# Altium PCB PCB2maks.pcbdoc (part 1 of 2)
Units mm, origin at the board's own origin, x right, y up, seen from the top; angles counter-clockwise.
Board outline 120 x 90 mm, 2 copper layers (Top Layer, Bottom Layer); 58 components, 77 nets, 319 pads, 159 vias.
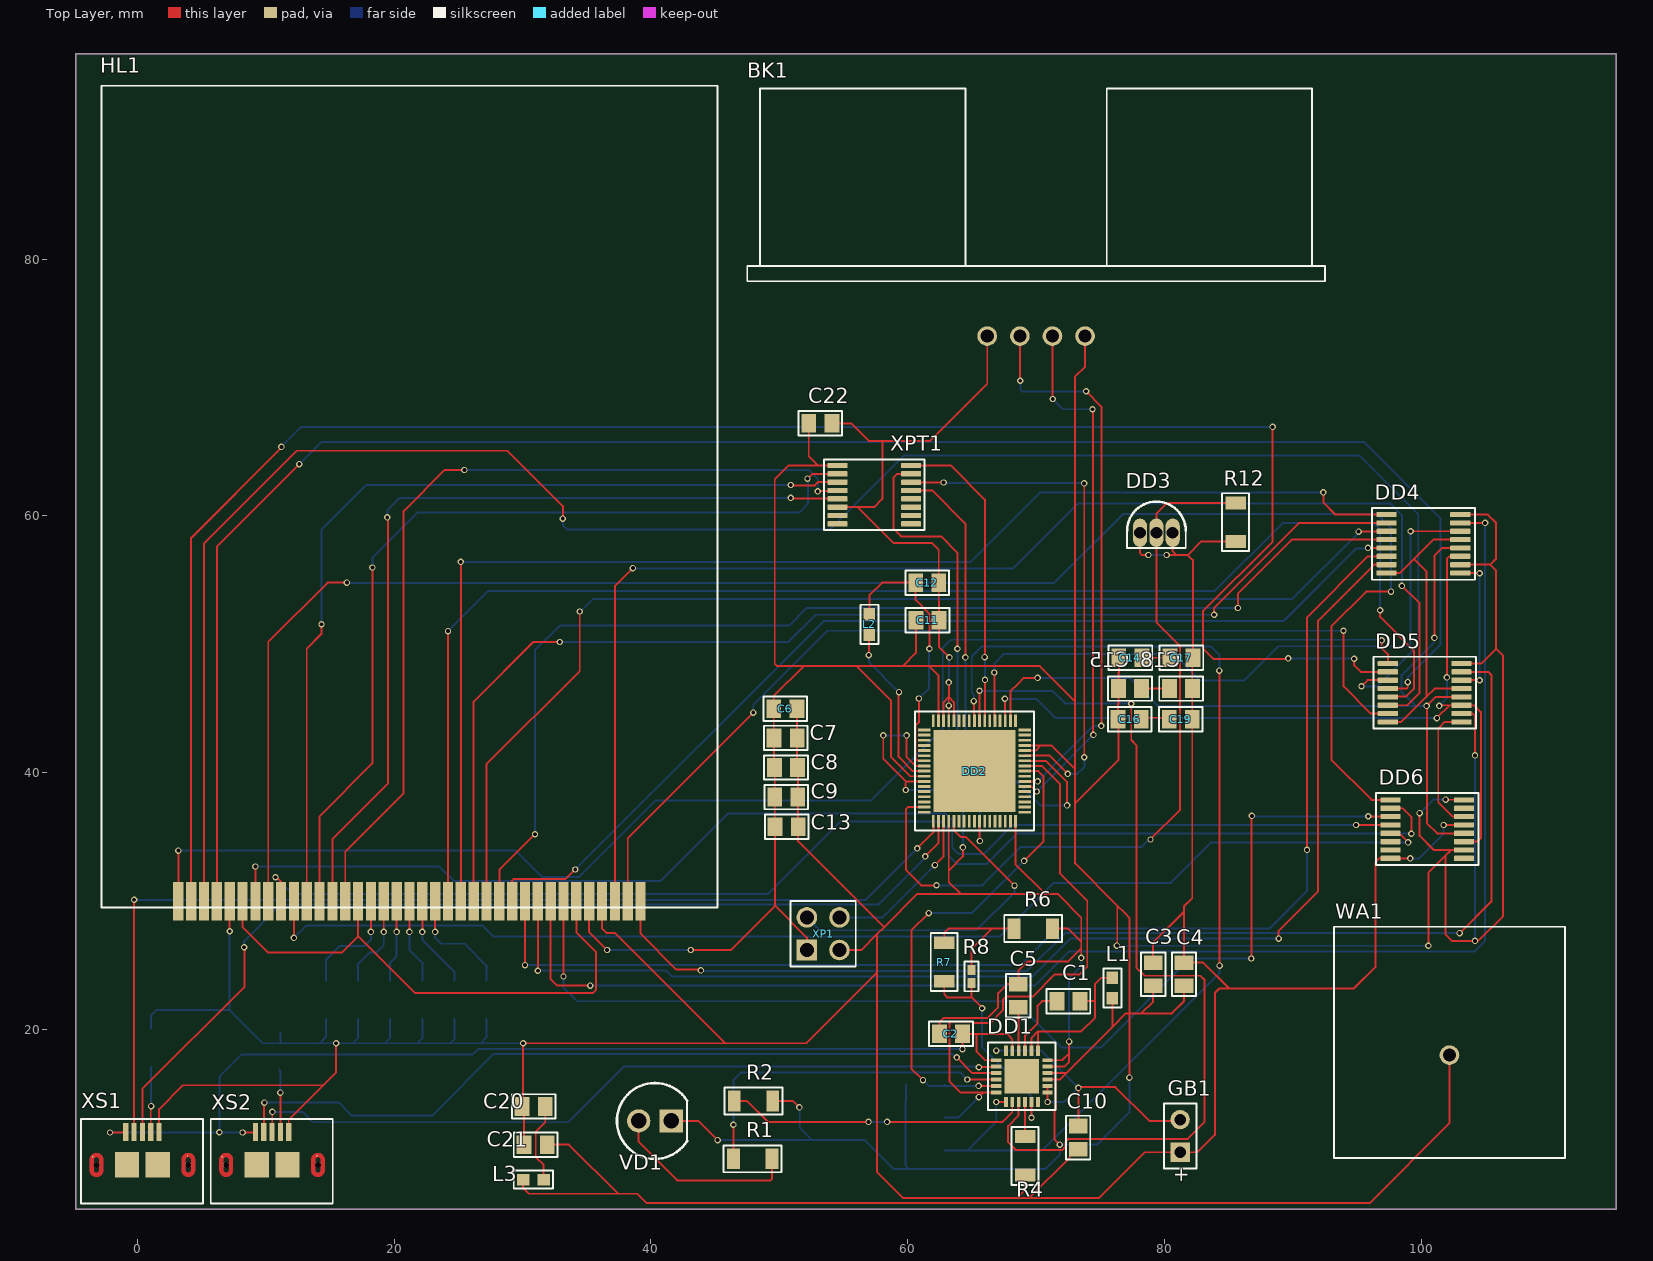
[diagram p0: Top Layer view]
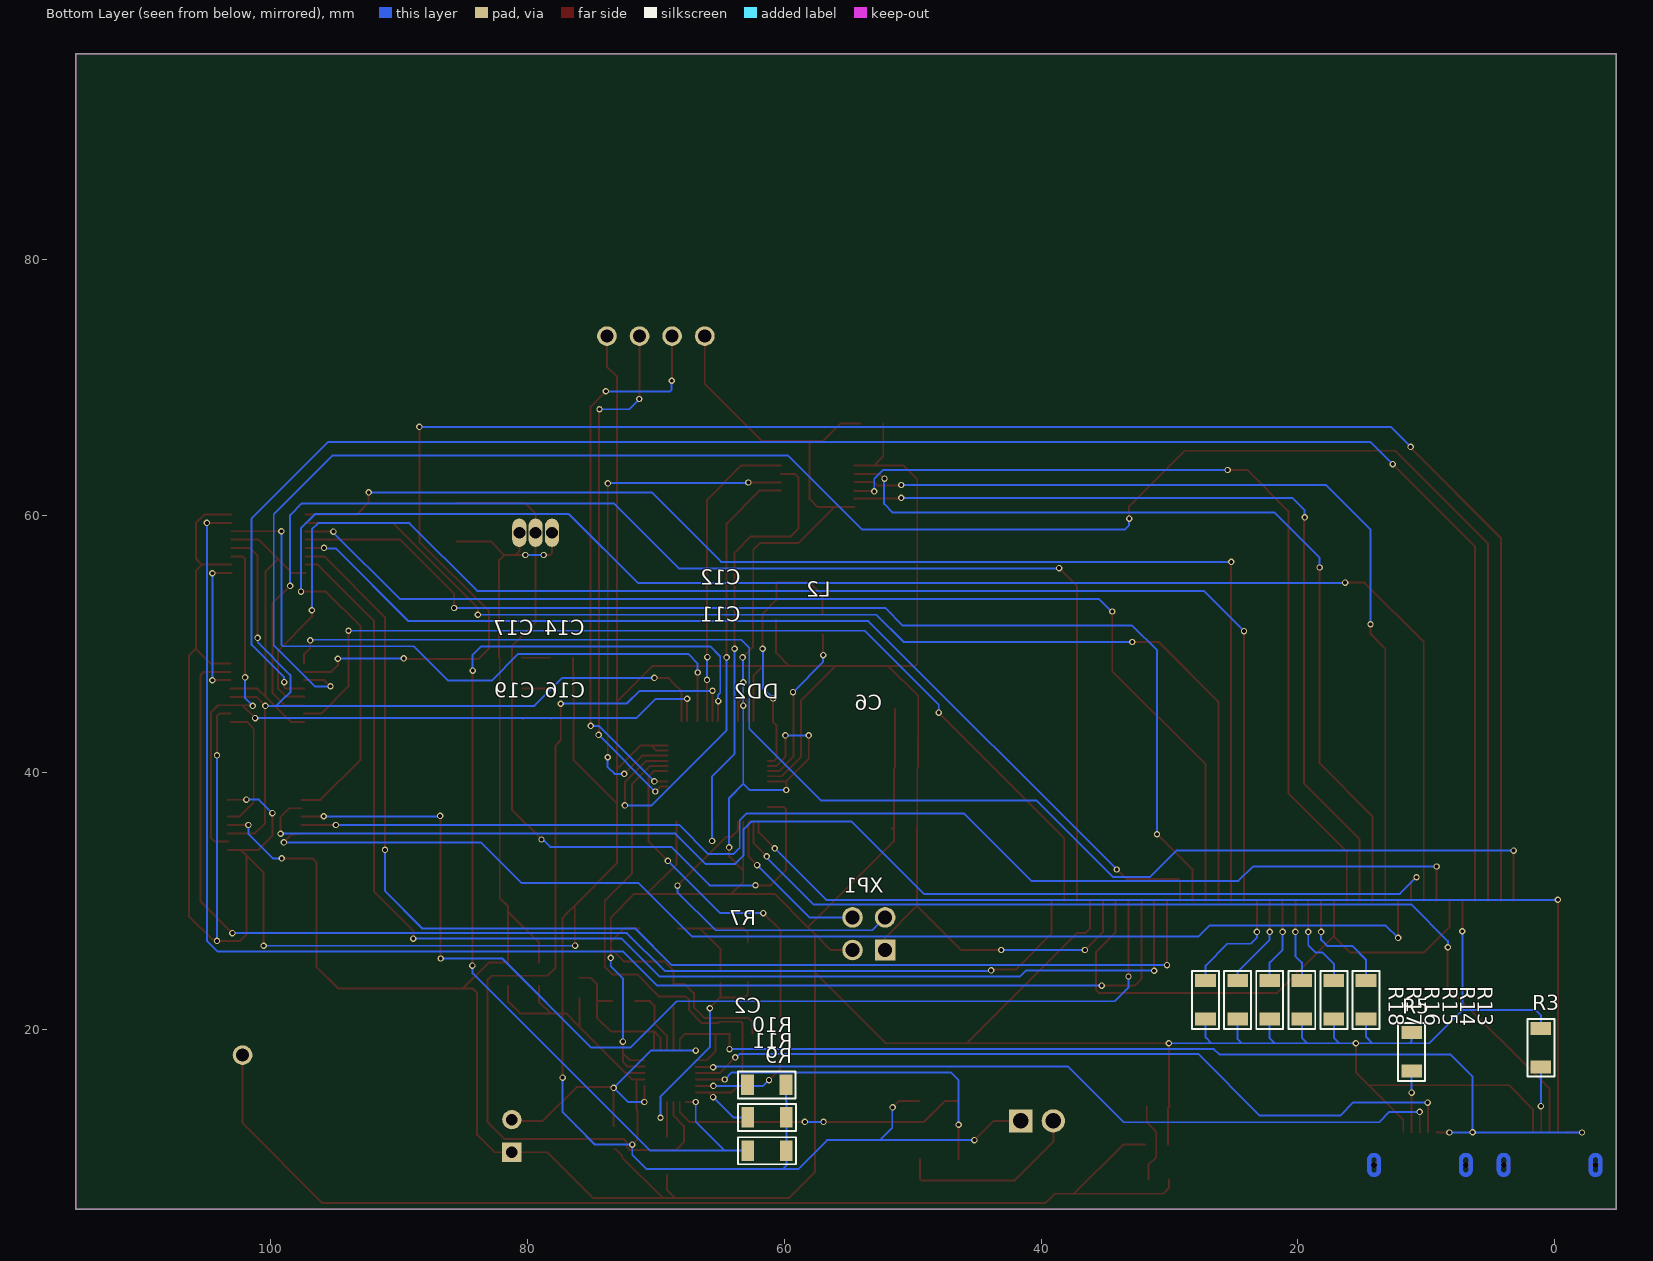
[diagram p1: Bottom Layer view, seen from below]
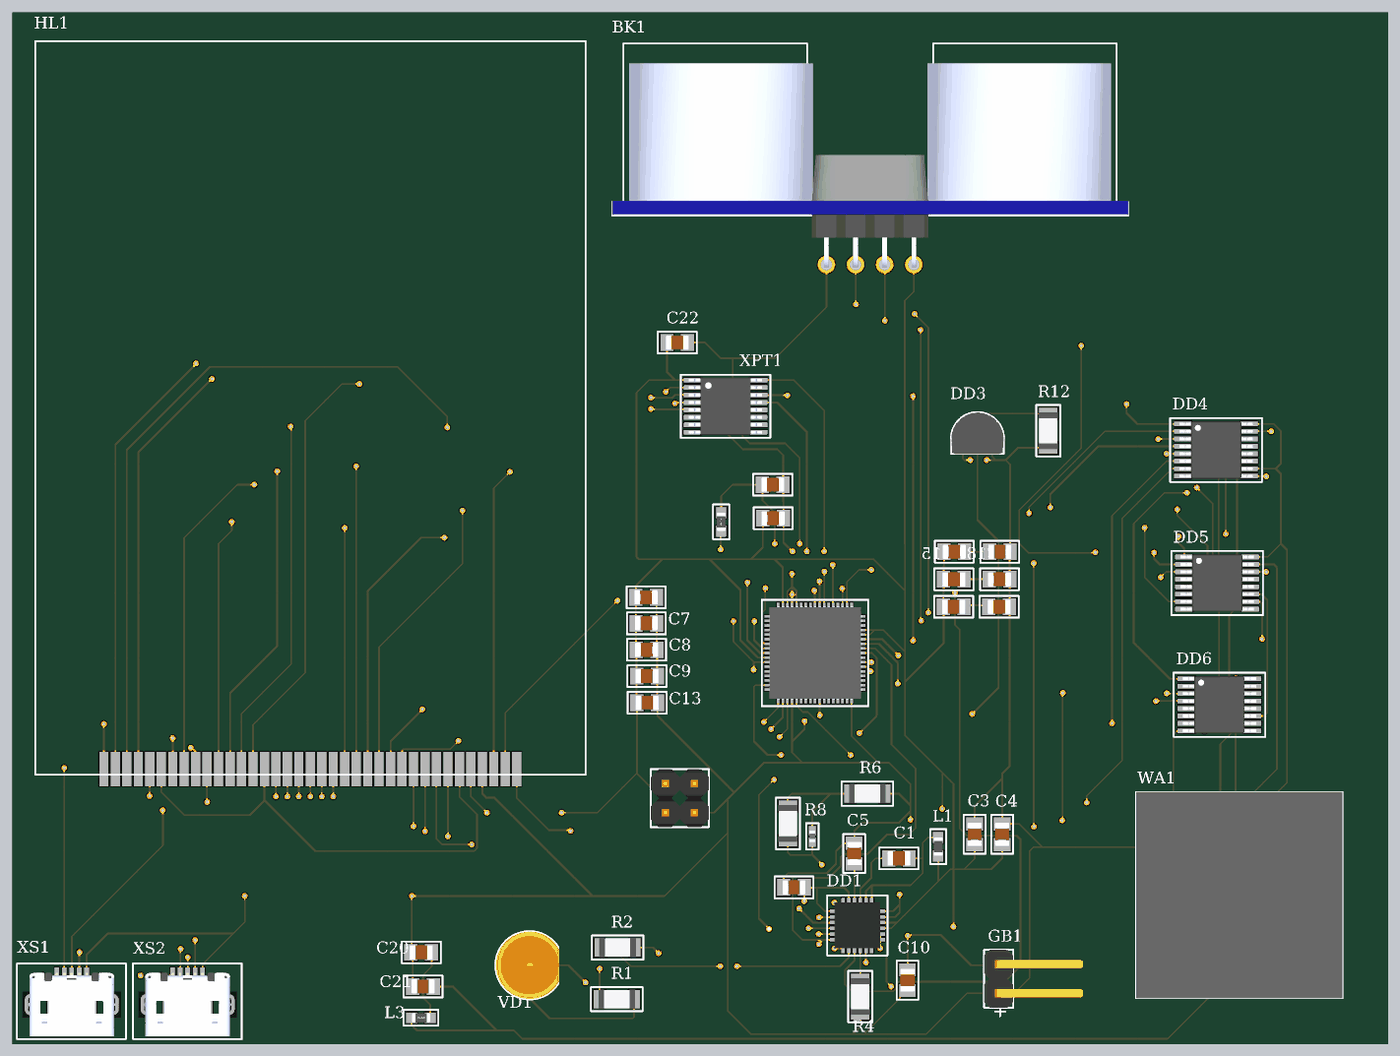
[diagram p3: 3D render of the assembled board from above, using the file's embedded part models]
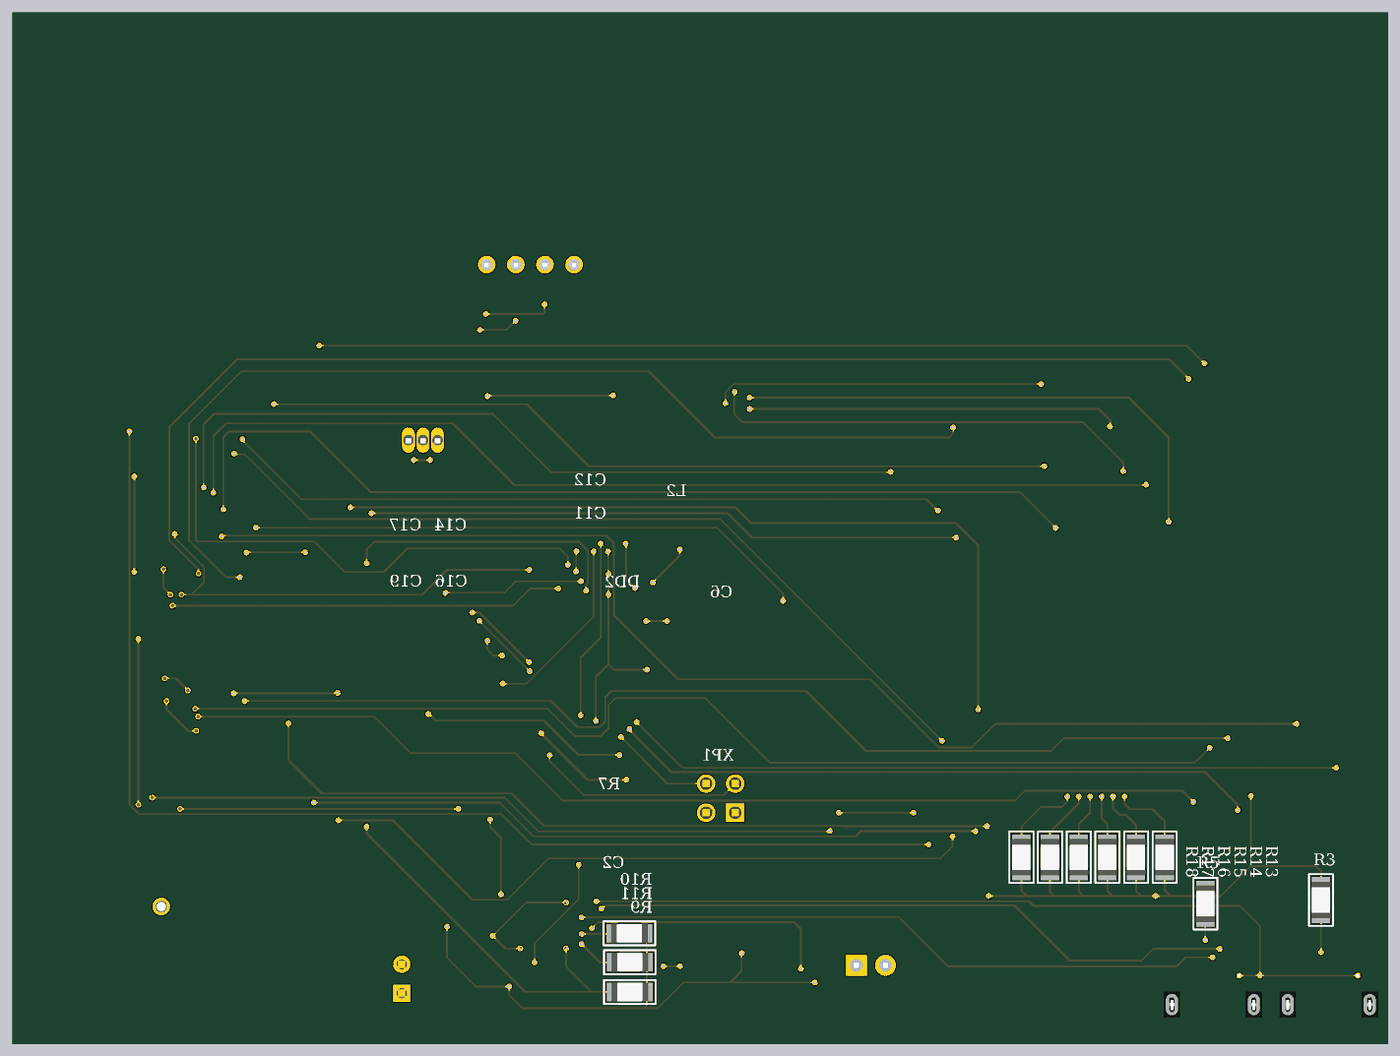
[diagram p4: 3D render of the assembled board from below, using the file's embedded part models]

## Layer stack, top to bottom
Top Solder: solder mask 0.0102, Solder Resist, Dk 3.5
Top Layer: signal copper 0.0356
Dielectric 1: dielectric 0.32, FR-4, Dk 4.8
Bottom Layer: signal copper 0.0356
Bottom Solder: solder mask 0.0102, Solder Resist, Dk 3.5

## Board outline
-4.8,6 115.2,6 115.2,96 -4.8,96

## Design rules (kind name [scope] priority, off if disabled: settings)
Clearance [All] p1: gap=0.1 ignorepadtopadclearanceinfootprint=TRUE
PolygonConnect [All] p1: connectstyle=Relief reliefconductorwidth=0.254 reliefentries=4 polygonreliefangle="90 Angle" airgapwidth=0.254
RoutingVias [All] p1: holewidth=0.3 width=0.5 viastyle="Through Hole" minholewidth=0.3 minwidth=0.5 maxholewidth=0.3 maxwidth=0.5
SolderMaskExpansion [All] p1: expansion=0.102 istentingtop=FALSE
Width [All] p1: maxlimit=10 minlimit=0.15 preferedwidth=0.2
30 further rules are at their usual default settings.

## Components (designator, comment, footprint, x,y, rotation, side; value= is the part's Value field where it differs from the comment)
BK1 "HC-SR04" HC-SR04 70.01,74 r180 top
C1 "Capacitor C0402C100C5GAC" Capasitor 72.525,22.2 r180 top
C2 "Capacitor C0402C100C5GAC" Capasitor 63.375,19.675 r0 top
C3 "Capacitor C0402C100C5GAC" Capasitor 79.125,24.3 r270 top
C4 "Capacitor C0402C100C5GAC" Capasitor 81.525,24.3 r270 top
C5 "Capacitor C0402C100C5GAC" Capasitor 68.625,22.625 r90 top
C6 "Capacitor C0402C100C5GAC" Capasitor 50.475,44.975 r0 top
C7 "Capacitor C0402C100C5GAC" Capasitor 50.5,42.7 r0 top
C8 "Capacitor C0402C100C5GAC" Capasitor 50.525,40.4 r0 top
C9 "Capacitor C0402C100C5GAC" Capasitor 50.55,38.1 r0 top
C10 "Capacitor C0402C100C5GAC" Capasitor 73.275,11.575 r270 top
C11 "Capacitor C0402C100C5GAC" Capasitor 61.55,51.875 r0 top
C12 "Capacitor C0402C100C5GAC" Capasitor 61.525,54.8 r180 top
C13 "Capacitor C0402C100C5GAC" Capasitor 50.575,35.775 r180 top
C14 "Capacitor C0402C100C5GAC" Capasitor 77.35,48.95 r0 top
C15 "Capacitor C0402C100C5GAC" Capasitor 77.32,46.55 r0 top
C16 "Capacitor C0402C100C5GAC" Capasitor 77.295,44.15 r0 top
C17 "Capacitor C0402C100C5GAC" Capasitor 81.325,48.95 r0 top
C18 "Capacitor C0402C100C5GAC" Capasitor 81.295,46.55 r0 top
C19 "Capacitor C0402C100C5GAC" Capasitor 81.27,44.15 r0 top
C20 "Capacitor C0402C100C5GAC" Capasitor 30.875,14 r0 top
C21 "Capacitor C0402C100C5GAC" Capasitor 31.025,11.025 r0 top
C22 "Capacitor C0402C100C5GAC" Capasitor 53.2,67.2 r180 top
DD1 "BQ24295RGER" bq24295 68.9,16.35 r0 top
DD2 "STM32WB55 VFQFPN68" STM32WB55VFQFPN68 65.2,40.12 r180 top
DD3 "DS18B20_1" ds18b20 79.375,59.525 r0 top
DD4 "HC595" 54HC595 100.175,57.825 r0 top
DD5 "HC595" 54HC595 100.27,46.225 r0 top
DD6 "HC595" 54HC595 100.47,35.6 r0 top
GB1 "Battery_1" Battery 81.407,11.665 r90 top
HL1 "ILI9341" ILI9325 21.2,61.5 r90 top
L1 "INDUCTION" "10uH Inductor" 75.95,23.24 r90 top
L2 "INDUCTION" "10uH Inductor" 57.025,51.565 r90 top
L3 "INDUCTION" "10uH Inductor" 30.865,8.3 r0 top
R1 "Resistor CRT0805-BY-1503EAS" Resistor 47.925,9.925 r180 top
R2 "Resistor CRT0805-BY-1503EAS" Resistor 48,14.425 r180 top
R3 "Resistor CRT0805-BY-1503EAS" Resistor 1.075,18.575 r90 bottom
R4 "Resistor CRT0805-BY-1503EAS" Resistor 69.15,10.15 r90 top
R5 "Resistor CRT0805-BY-1503EAS" Resistor 11.15,18.25 r90 bottom
R6 "Resistor CRT0805-BY-1503EAS" Resistor 69.775,27.85 r180 top
R7 "Resistor CRT0805-BY-1503EAS" Resistor 62.85,25.25 r90 top
R8 "Resistor_termo" THRMC1005X55N 64.975,24.125 r90 top
R9 "Resistor CRT0805-BY-1503EAS" Resistor 61.35,10.55 r180 bottom
R10 "Resistor CRT0805-BY-1503EAS" Resistor 61.375,15.675 r180 bottom
R11 "Resistor CRT0805-BY-1503EAS" Resistor 61.35,13.15 r180 bottom
R12 "Resistor CRT0805-BY-1503EAS" Resistor 85.55,59.51 r270 top
R13 "Resistor CRT0805-BY-1503EAS" Resistor 14.7,22.3 r90 bottom
R14 "Resistor CRT0805-BY-1503EAS" Resistor 17.2,22.3 r90 bottom
R15 "Resistor CRT0805-BY-1503EAS" Resistor 19.7,22.3 r90 bottom
R16 "Resistor CRT0805-BY-1503EAS" Resistor 22.2,22.3 r90 bottom
R17 "Resistor CRT0805-BY-1503EAS" Resistor 24.7,22.3 r90 bottom
R18 "Resistor CRT0805-BY-1503EAS" Resistor 27.2,22.3 r90 bottom
VD1 "svetodiod" LEDRD254W57D500H1070 40.32,12.875 r180 top
WA1 "antenna" antena 102.2,18 r0 top
XP1 "SWD" SWD1 53.42,27.455 r0 top
XPT1 "XPT?" xpt2046 57.405,61.65 r0 top
XS1 "microUSB(629105136821)_1" microUSB 0.4,9.45 r0 top
XS2 "microUSB(629105136821)_1" microUSB 10.5,9.45 r0 top

## Footprints (in the part's own frame and the unit in brackets; to place one, negate y for a bottom-side part, rotate by r counter-clockwise, add the part's x,y. Pads: shape width x height; smd on the part's side, far side on the other; paste and mask are expansions set on the pad)
"10uH Inductor" [mm]
  rect 0.97x0.9 smd: 1(0.785,0) 2(-0.815,0)
  silkscreen extent -1.54,-0.7 1.51,0.7, body extent -0.8,-0.4 0.8,0.4, height 0.8
54HC595 [mm]
  rrect25% 1.57x0.41 smd: 1(-2.87,2.275) 2(-2.87,1.625) 3(-2.87,0.975) 4(-2.87,0.325) 5(-2.87,-0.325) 6(-2.87,-0.975) 7(-2.87,-1.625) 8(-2.87,-2.275) 9(2.87,-2.275) 10(2.87,-1.625) 11(2.87,-0.975) 12(2.87,-0.325) 13(2.87,0.325) 14(2.87,0.975) 15(2.87,1.625) 16(2.87,2.275)
  silkscreen extent -4,-2.8 4,2.8, body extent -3.2,-2.5 3.2,2.5, height 1.2
antena [mm]
  round 1.53 hole 1.02: 1(0,0)
  silkscreen extent -9,-8 9,10, body extent -9,-8 9,10, height 5
Battery [mm]
  rect 1.5x1.5 hole 0.9: 1(-1.23,0.182)
  round 1.5 hole 0.9: 2(1.31,0.182)
  silkscreen extent -2.5,-1.09 2.58,1.45, body extent -2.5,-7.17 2.58,1.45, height 5.85
bq24295 [mm]
  rect 0.8x0.3 smd: 1(-2,1.25) 2(-2,0.75) 3(-2,0.25) 4(-2,-0.25) 5(-2,-0.75) 6(-2,-1.25) 13(2,-1.25) 14(2,-0.75) 15(2,-0.25) 16(2,0.25) 17(2,0.75) 18(2,1.25)
  rect 0.3x0.8 smd: 7(-1.25,-2) 8(-0.75,-2) 9(-0.25,-2) 10(0.25,-2) 11(0.75,-2) 12(1.25,-2) 19(1.25,2) 20(0.75,2) 21(0.25,2) 22(-0.25,2) 23(-0.75,2) 24(-1.25,2)
  rect 2.7x2.7 smd: 25(0,0)
  silkscreen extent -2.62,-2.63 2.62,2.62, body extent -2,-2 2,2, height 1
Capasitor [mm]
  rect 1.15x1.45 smd: 1(-0.9,0) 2(0.9,0)
  silkscreen extent -1.7,-0.95 1.7,0.95, body extent -1,-0.63 1,0.63, height 0.94
ds18b20 [mm]
  oval 1.1x2.2 hole 0.93: 1(-1.27,-0.84) 2(0,-0.84) 3(1.27,-0.84)
  silkscreen extent -2.28,-2.04 2.28,1.58, body extent -2.28,-2.04 2.28,1.58, height 5.45
HC-SR04 [mm]
  round 1.53 hole 1.02: 1(-3.81,0) 2(-1.27,0) 3(1.27,0) 4(3.81,0)
  silkscreen extent -22.5,-19.27 22.5,-4.27, body extent -22.5,-17.55 22.5,0.25, height 20
ILI9325 [mm]
  rect 3x0.8 smd: 1(-31.5,18) 2(-31.5,17) 3(-31.5,16) 4(-31.5,15) 5(-31.5,14) 6(-31.5,13) 7(-31.5,12) 8(-31.5,11) 9(-31.5,10) 10(-31.5,9) 11(-31.5,8) 12(-31.5,7) 13(-31.5,6) 14(-31.5,5) 15(-31.5,4) 16(-31.5,3) 17(-31.5,2) 18(-31.5,1) 19(-31.5,0) 20(-31.5,-1) 21(-31.5,-2) 22(-31.5,-3) 23(-31.5,-4) 24(-31.5,-5) 25(-31.5,-6) 26(-31.5,-7) 27(-31.5,-8) 28(-31.5,-9) 29(-31.5,-10) 30(-31.5,-11) 31(-31.5,-12) 32(-31.5,-13) 33(-31.5,-14) 34(-31.5,-15) 35(-31.5,-16) 36(-31.5,-17) 37(-31.5,-18)
  silkscreen extent -32,-24 32,24, body extent -31.5,-23.2 31.5,23.2, height 2.53
LEDRD254W57D500H1070 [mm]
  rect 1.815x1.815 hole 1.21: 1(-1.27,0)
  round 1.815 hole 1.21: 2(1.27,0)
  silkscreen extent -2.5,-2.96 2.96,2.96, body extent -2.6,-2.95 2.95,2.95, height 9.1
microUSB [mm]
  rect 0.4x1.4 smd: 1(-1.3,2.55) 2(-0.65,2.55) 3(0,2.55) 4(0.65,2.55) 5(1.3,2.55)
  rect 0.1x0.1 smd paste-1 mask+0: 6(-3.87,0.63) 7(3.51,0.72)
  rect 1.9x2 smd: 8(-1.2,0) 9(1.2,0)
  round 0.45 hole 0.45 unplated: ""(-3.575,0) ""(3.575,0)
  Top Layer region: -3.548,0.924 -3.52,0.922 -3.493,0.919 -3.466,0.914 -3.439,0.907 -3.413,0.899 -3.387,0.89 -3.361,0.88 -3.337,0.868 -3.313,0.855 -3.289,0.84 -3.266,0.825 -3.245,0.808 -3.224,0.79 -3.204,0.771 -3.185,0.751 -3.167,0.73 -3.15,0.709 -3.135,0.686 -3.12,0.663 -3.107,0.638 -3.095,0.614 -3.085,0.588 -3.076,0.562 -3.068,0.536 -3.061,0.509 -3.056,0.482 -3.053,0.455 -3.051,0.427 -3.05,0.4 -3.05,0 -3.35,0 -3.35,0.4 -3.35,0.412 -3.351,0.424 -3.353,0.435 -3.355,0.447 -3.358,0.458 -3.361,0.47 -3.365,0.481 -3.369,0.492 -3.375,0.502 -3.38,0.513 -3.386,0.523 -3.393,0.532 -3.4,0.542 -3.408,0.551 -3.416,0.559 -3.424,0.567 -3.433,0.575 -3.443,0.582 -3.452,0.589 -3.463,0.595 -3.473,0.6 -3.483,0.606 -3.494,0.61 -3.505,0.614 -3.517,0.617 -3.528,0.62 -3.54,0.622 -3.551,0.624 -3.563,0.625 -3.575,0.625 -3.587,0.625 -3.599,0.624 -3.61,0.622 -3.622,0.62 -3.633,0.617 -3.645,0.614 -3.656,0.61 -3.667,0.606 -3.677,0.6 -3.688,0.595 -3.698,0.589 -3.707,0.582 -3.717,0.575 -3.726,0.567 -3.734,0.559 -3.742,0.551 -3.75,0.542 -3.757,0.532 -3.764,0.523 -3.77,0.513 -3.775,0.502 -3.781,0.492 -3.785,0.481 -3.789,0.47 -3.792,0.458 -3.795,0.447 -3.797,0.435 -3.799,0.424 -3.8,0.412 -3.8,0.4 -3.8,0 -4.1,0 -4.1,0.4 -4.099,0.427 -4.097,0.455 -4.094,0.482 -4.089,0.509 -4.082,0.536 -4.074,0.562 -4.065,0.588 -4.055,0.614 -4.043,0.638 -4.03,0.663 -4.015,0.686 -4,0.709 -3.983,0.73 -3.965,0.751 -3.946,0.771 -3.926,0.79 -3.905,0.808 -3.884,0.825 -3.861,0.84 -3.838,0.855 -3.813,0.868 -3.789,0.88 -3.763,0.89 -3.737,0.899 -3.711,0.907 -3.684,0.914 -3.657,0.919 -3.63,0.922 -3.602,0.924 -3.575,0.925
  Top Layer region: -3.05,-0.4 -3.051,-0.427 -3.053,-0.455 -3.056,-0.482 -3.061,-0.509 -3.068,-0.536 -3.076,-0.562 -3.085,-0.588 -3.095,-0.614 -3.107,-0.638 -3.12,-0.663 -3.135,-0.686 -3.15,-0.709 -3.167,-0.73 -3.185,-0.751 -3.204,-0.771 -3.224,-0.79 -3.245,-0.808 -3.266,-0.825 -3.289,-0.84 -3.313,-0.855 -3.337,-0.868 -3.361,-0.88 -3.387,-0.89 -3.413,-0.899 -3.439,-0.907 -3.466,-0.914 -3.493,-0.919 -3.52,-0.922 -3.548,-0.924 -3.575,-0.925 -3.602,-0.924 -3.63,-0.922 -3.657,-0.919 -3.684,-0.914 -3.711,-0.907 -3.737,-0.899 -3.763,-0.89 -3.789,-0.88 -3.813,-0.868 -3.838,-0.855 -3.861,-0.84 -3.884,-0.825 -3.905,-0.808 -3.926,-0.79 -3.946,-0.771 -3.965,-0.751 -3.983,-0.73 -4,-0.709 -4.015,-0.686 -4.03,-0.663 -4.043,-0.638 -4.055,-0.614 -4.065,-0.588 -4.074,-0.562 -4.082,-0.536 -4.089,-0.509 -4.094,-0.482 -4.097,-0.455 -4.099,-0.427 -4.1,-0.4 -4.1,0 -3.8,0 -3.8,-0.4 -3.8,-0.412 -3.799,-0.424 -3.797,-0.435 -3.795,-0.447 -3.792,-0.458 -3.789,-0.47 -3.785,-0.481 -3.781,-0.492 -3.775,-0.502 -3.77,-0.513 -3.764,-0.523 -3.757,-0.532 -3.75,-0.542 -3.742,-0.551 -3.734,-0.559 -3.726,-0.567 -3.717,-0.575 -3.707,-0.582 -3.698,-0.589 -3.688,-0.595 -3.677,-0.6 -3.667,-0.606 -3.656,-0.61 -3.645,-0.614 -3.633,-0.617 -3.622,-0.62 -3.61,-0.622 -3.599,-0.624 -3.587,-0.625 -3.575,-0.625 -3.563,-0.625 -3.551,-0.624 -3.54,-0.622 -3.528,-0.62 -3.517,-0.617 -3.505,-0.614 -3.494,-0.61 -3.483,-0.606 -3.473,-0.6 -3.463,-0.595 -3.452,-0.589 -3.443,-0.582 -3.433,-0.575 -3.424,-0.567 -3.416,-0.559 -3.408,-0.551 -3.4,-0.542 -3.393,-0.532 -3.386,-0.523 -3.38,-0.513 -3.375,-0.502 -3.369,-0.492 -3.365,-0.481 -3.361,-0.47 -3.358,-0.458 -3.355,-0.447 -3.353,-0.435 -3.351,-0.424 -3.35,-0.412 -3.35,-0.4 -3.35,0 -3.05,0
  Top Layer region: 3.602,0.924 3.63,0.922 3.657,0.919 3.684,0.914 3.711,0.907 3.737,0.899 3.763,0.89 3.789,0.88 3.813,0.868 3.838,0.855 3.861,0.84 3.884,0.825 3.905,0.808 3.926,0.79 3.946,0.771 3.965,0.751 3.983,0.73 4,0.709 4.015,0.686 4.03,0.663 4.043,0.638 4.055,0.614 4.065,0.588 4.074,0.562 4.082,0.536 4.089,0.509 4.094,0.482 4.097,0.455 4.099,0.427 4.1,0.4 4.1,0 3.8,0 3.8,0.4 3.8,0.412 3.799,0.424 3.797,0.435 3.795,0.447 3.792,0.458 3.789,0.47 3.785,0.481 3.781,0.492 3.775,0.502 3.77,0.513 3.764,0.523 3.757,0.532 3.75,0.542 3.742,0.551 3.734,0.559 3.726,0.567 3.717,0.575 3.707,0.582 3.698,0.589 3.688,0.595 3.677,0.6 3.667,0.606 3.656,0.61 3.645,0.614 3.633,0.617 3.622,0.62 3.61,0.622 3.599,0.624 3.587,0.625 3.575,0.625 3.563,0.625 3.551,0.624 3.54,0.622 3.528,0.62 3.517,0.617 3.505,0.614 3.494,0.61 3.483,0.606 3.473,0.6 3.463,0.595 3.452,0.589 3.443,0.582 3.433,0.575 3.424,0.567 3.416,0.559 3.408,0.551 3.4,0.542 3.393,0.532 3.386,0.523 3.38,0.513 3.375,0.502 3.369,0.492 3.365,0.481 3.361,0.47 3.358,0.458 3.355,0.447 3.353,0.435 3.351,0.424 3.35,0.412 3.35,0.4 3.35,0 3.05,0 3.05,0.4 3.051,0.427 3.053,0.455 3.056,0.482 3.061,0.509 3.068,0.536 3.076,0.562 3.085,0.588 3.095,0.614 3.107,0.638 3.12,0.663 3.135,0.686 3.15,0.709 3.167,0.73 3.185,0.751 3.204,0.771 3.224,0.79 3.245,0.808 3.266,0.825 3.289,0.84 3.313,0.855 3.337,0.868 3.361,0.88 3.387,0.89 3.413,0.899 3.439,0.907 3.466,0.914 3.493,0.919 3.52,0.922 3.548,0.924 3.575,0.925
  Top Layer region: 4.1,-0.4 4.099,-0.427 4.097,-0.455 4.094,-0.482 4.089,-0.509 4.082,-0.536 4.074,-0.562 4.065,-0.588 4.055,-0.614 4.043,-0.638 4.03,-0.663 4.015,-0.686 4,-0.709 3.983,-0.73 3.965,-0.751 3.946,-0.771 3.926,-0.79 3.905,-0.808 3.884,-0.825 3.861,-0.84 3.838,-0.855 3.813,-0.868 3.789,-0.88 3.763,-0.89 3.737,-0.899 3.711,-0.907 3.684,-0.914 3.657,-0.919 3.63,-0.922 3.602,-0.924 3.575,-0.925 3.548,-0.924 3.52,-0.922 3.493,-0.919 3.466,-0.914 3.439,-0.907 3.413,-0.899 3.387,-0.89 3.361,-0.88 3.337,-0.868 3.313,-0.855 3.289,-0.84 3.266,-0.825 3.245,-0.808 3.224,-0.79 3.204,-0.771 3.185,-0.751 3.167,-0.73 3.15,-0.709 3.135,-0.686 3.12,-0.663 3.107,-0.638 3.095,-0.614 3.085,-0.588 3.076,-0.562 3.068,-0.536 3.061,-0.509 3.056,-0.482 3.053,-0.455 3.051,-0.427 3.05,-0.4 3.05,0 3.35,0 3.35,-0.4 3.35,-0.412 3.351,-0.424 3.353,-0.435 3.355,-0.447 3.358,-0.458 3.361,-0.47 3.365,-0.481 3.369,-0.492 3.375,-0.502 3.38,-0.513 3.386,-0.523 3.393,-0.532 3.4,-0.542 3.408,-0.551 3.416,-0.559 3.424,-0.567 3.433,-0.575 3.443,-0.582 3.452,-0.589 3.463,-0.595 3.473,-0.6 3.483,-0.606 3.494,-0.61 3.505,-0.614 3.517,-0.617 3.528,-0.62 3.54,-0.622 3.551,-0.624 3.563,-0.625 3.575,-0.625 3.587,-0.625 3.599,-0.624 3.61,-0.622 3.622,-0.62 3.633,-0.617 3.645,-0.614 3.656,-0.61 3.667,-0.606 3.677,-0.6 3.688,-0.595 3.698,-0.589 3.707,-0.582 3.717,-0.575 3.726,-0.567 3.734,-0.559 3.742,-0.551 3.75,-0.542 3.757,-0.532 3.764,-0.523 3.77,-0.513 3.775,-0.502 3.781,-0.492 3.785,-0.481 3.789,-0.47 3.792,-0.458 3.795,-0.447 3.797,-0.435 3.799,-0.424 3.8,-0.412 3.8,-0.4 3.8,0 4.1,0
  Bottom Layer region: -3.548,0.924 -3.52,0.922 -3.493,0.919 -3.466,0.914 -3.439,0.907 -3.413,0.899 -3.387,0.89 -3.361,0.88 -3.337,0.868 -3.313,0.855 -3.289,0.84 -3.266,0.825 -3.245,0.808 -3.224,0.79 -3.204,0.771 -3.185,0.751 -3.167,0.73 -3.15,0.709 -3.135,0.686 -3.12,0.663 -3.107,0.638 -3.095,0.614 -3.085,0.588 -3.076,0.562 -3.068,0.536 -3.061,0.509 -3.056,0.482 -3.053,0.455 -3.051,0.427 -3.05,0.4 -3.05,0 -3.35,0 -3.35,0.4 -3.35,0.412 -3.351,0.424 -3.353,0.435 -3.355,0.447 -3.358,0.458 -3.361,0.47 -3.365,0.481 -3.369,0.492 -3.375,0.502 -3.38,0.513 -3.386,0.523 -3.393,0.532 -3.4,0.542 -3.408,0.551 -3.416,0.559 -3.424,0.567 -3.433,0.575 -3.443,0.582 -3.452,0.589 -3.463,0.595 -3.473,0.6 -3.483,0.606 -3.494,0.61 -3.505,0.614 -3.517,0.617 -3.528,0.62 -3.54,0.622 -3.551,0.624 -3.563,0.625 -3.575,0.625 -3.587,0.625 -3.599,0.624 -3.61,0.622 -3.622,0.62 -3.633,0.617 -3.645,0.614 -3.656,0.61 -3.667,0.606 -3.677,0.6 -3.688,0.595 -3.698,0.589 -3.707,0.582 -3.717,0.575 -3.726,0.567 -3.734,0.559 -3.742,0.551 -3.75,0.542 -3.757,0.532 -3.764,0.523 -3.77,0.513 -3.775,0.502 -3.781,0.492 -3.785,0.481 -3.789,0.47 -3.792,0.458 -3.795,0.447 -3.797,0.435 -3.799,0.424 -3.8,0.412 -3.8,0.4 -3.8,0 -4.1,0 -4.1,0.4 -4.099,0.427 -4.097,0.455 -4.094,0.482 -4.089,0.509 -4.082,0.536 -4.074,0.562 -4.065,0.588 -4.055,0.614 -4.043,0.638 -4.03,0.663 -4.015,0.686 -4,0.709 -3.983,0.73 -3.965,0.751 -3.946,0.771 -3.926,0.79 -3.905,0.808 -3.884,0.825 -3.861,0.84 -3.838,0.855 -3.813,0.868 -3.789,0.88 -3.763,0.89 -3.737,0.899 -3.711,0.907 -3.684,0.914 -3.657,0.919 -3.63,0.922 -3.602,0.924 -3.575,0.925
  Bottom Layer region: -3.05,-0.4 -3.051,-0.427 -3.053,-0.455 -3.056,-0.482 -3.061,-0.509 -3.068,-0.536 -3.076,-0.562 -3.085,-0.588 -3.095,-0.614 -3.107,-0.638 -3.12,-0.663 -3.135,-0.686 -3.15,-0.709 -3.167,-0.73 -3.185,-0.751 -3.204,-0.771 -3.224,-0.79 -3.245,-0.808 -3.266,-0.825 -3.289,-0.84 -3.313,-0.855 -3.337,-0.868 -3.361,-0.88 -3.387,-0.89 -3.413,-0.899 -3.439,-0.907 -3.466,-0.914 -3.493,-0.919 -3.52,-0.922 -3.548,-0.924 -3.575,-0.925 -3.602,-0.924 -3.63,-0.922 -3.657,-0.919 -3.684,-0.914 -3.711,-0.907 -3.737,-0.899 -3.763,-0.89 -3.789,-0.88 -3.813,-0.868 -3.838,-0.855 -3.861,-0.84 -3.884,-0.825 -3.905,-0.808 -3.926,-0.79 -3.946,-0.771 -3.965,-0.751 -3.983,-0.73 -4,-0.709 -4.015,-0.686 -4.03,-0.663 -4.043,-0.638 -4.055,-0.614 -4.065,-0.588 -4.074,-0.562 -4.082,-0.536 -4.089,-0.509 -4.094,-0.482 -4.097,-0.455 -4.099,-0.427 -4.1,-0.4 -4.1,0 -3.8,0 -3.8,-0.4 -3.8,-0.412 -3.799,-0.424 -3.797,-0.435 -3.795,-0.447 -3.792,-0.458 -3.789,-0.47 -3.785,-0.481 -3.781,-0.492 -3.775,-0.502 -3.77,-0.513 -3.764,-0.523 -3.757,-0.532 -3.75,-0.542 -3.742,-0.551 -3.734,-0.559 -3.726,-0.567 -3.717,-0.575 -3.707,-0.582 -3.698,-0.589 -3.688,-0.595 -3.677,-0.6 -3.667,-0.606 -3.656,-0.61 -3.645,-0.614 -3.633,-0.617 -3.622,-0.62 -3.61,-0.622 -3.599,-0.624 -3.587,-0.625 -3.575,-0.625 -3.563,-0.625 -3.551,-0.624 -3.54,-0.622 -3.528,-0.62 -3.517,-0.617 -3.505,-0.614 -3.494,-0.61 -3.483,-0.606 -3.473,-0.6 -3.463,-0.595 -3.452,-0.589 -3.443,-0.582 -3.433,-0.575 -3.424,-0.567 -3.416,-0.559 -3.408,-0.551 -3.4,-0.542 -3.393,-0.532 -3.386,-0.523 -3.38,-0.513 -3.375,-0.502 -3.369,-0.492 -3.365,-0.481 -3.361,-0.47 -3.358,-0.458 -3.355,-0.447 -3.353,-0.435 -3.351,-0.424 -3.35,-0.412 -3.35,-0.4 -3.35,0 -3.05,0
  Bottom Layer region: 4.1,-0.4 4.099,-0.427 4.097,-0.455 4.094,-0.482 4.089,-0.509 4.082,-0.536 4.074,-0.562 4.065,-0.588 4.055,-0.614 4.043,-0.638 4.03,-0.663 4.015,-0.686 4,-0.709 3.983,-0.73 3.965,-0.751 3.946,-0.771 3.926,-0.79 3.905,-0.808 3.884,-0.825 3.861,-0.84 3.838,-0.855 3.813,-0.868 3.789,-0.88 3.763,-0.89 3.737,-0.899 3.711,-0.907 3.684,-0.914 3.657,-0.919 3.63,-0.922 3.602,-0.924 3.575,-0.925 3.548,-0.924 3.52,-0.922 3.493,-0.919 3.466,-0.914 3.439,-0.907 3.413,-0.899 3.387,-0.89 3.361,-0.88 3.337,-0.868 3.313,-0.855 3.289,-0.84 3.266,-0.825 3.245,-0.808 3.224,-0.79 3.204,-0.771 3.185,-0.751 3.167,-0.73 3.15,-0.709 3.135,-0.686 3.12,-0.663 3.107,-0.638 3.095,-0.614 3.085,-0.588 3.076,-0.562 3.068,-0.536 3.061,-0.509 3.056,-0.482 3.053,-0.455 3.051,-0.427 3.05,-0.4 3.05,0 3.35,0 3.35,-0.4 3.35,-0.412 3.351,-0.424 3.353,-0.435 3.355,-0.447 3.358,-0.458 3.361,-0.47 3.365,-0.481 3.369,-0.492 3.375,-0.502 3.38,-0.513 3.386,-0.523 3.393,-0.532 3.4,-0.542 3.408,-0.551 3.416,-0.559 3.424,-0.567 3.433,-0.575 3.443,-0.582 3.452,-0.589 3.463,-0.595 3.473,-0.6 3.483,-0.606 3.494,-0.61 3.505,-0.614 3.517,-0.617 3.528,-0.62 3.54,-0.622 3.551,-0.624 3.563,-0.625 3.575,-0.625 3.587,-0.625 3.599,-0.624 3.61,-0.622 3.622,-0.62 3.633,-0.617 3.645,-0.614 3.656,-0.61 3.667,-0.606 3.677,-0.6 3.688,-0.595 3.698,-0.589 3.707,-0.582 3.717,-0.575 3.726,-0.567 3.734,-0.559 3.742,-0.551 3.75,-0.542 3.757,-0.532 3.764,-0.523 3.77,-0.513 3.775,-0.502 3.781,-0.492 3.785,-0.481 3.789,-0.47 3.792,-0.458 3.795,-0.447 3.797,-0.435 3.799,-0.424 3.8,-0.412 3.8,-0.4 3.8,0 4.1,0
  Bottom Layer region: 3.602,0.924 3.63,0.922 3.657,0.919 3.684,0.914 3.711,0.907 3.737,0.899 3.763,0.89 3.789,0.88 3.813,0.868 3.838,0.855 3.861,0.84 3.884,0.825 3.905,0.808 3.926,0.79 3.946,0.771 3.965,0.751 3.983,0.73 4,0.709 4.015,0.686 4.03,0.663 4.043,0.638 4.055,0.614 4.065,0.588 4.074,0.562 4.082,0.536 4.089,0.509 4.094,0.482 4.097,0.455 4.099,0.427 4.1,0.4 4.1,0 3.8,0 3.8,0.4 3.8,0.412 3.799,0.424 3.797,0.435 3.795,0.447 3.792,0.458 3.789,0.47 3.785,0.481 3.781,0.492 3.775,0.502 3.77,0.513 3.764,0.523 3.757,0.532 3.75,0.542 3.742,0.551 3.734,0.559 3.726,0.567 3.717,0.575 3.707,0.582 3.698,0.589 3.688,0.595 3.677,0.6 3.667,0.606 3.656,0.61 3.645,0.614 3.633,0.617 3.622,0.62 3.61,0.622 3.599,0.624 3.587,0.625 3.575,0.625 3.563,0.625 3.551,0.624 3.54,0.622 3.528,0.62 3.517,0.617 3.505,0.614 3.494,0.61 3.483,0.606 3.473,0.6 3.463,0.595 3.452,0.589 3.443,0.582 3.433,0.575 3.424,0.567 3.416,0.559 3.408,0.551 3.4,0.542 3.393,0.532 3.386,0.523 3.38,0.513 3.375,0.502 3.369,0.492 3.365,0.481 3.361,0.47 3.358,0.458 3.355,0.447 3.353,0.435 3.351,0.424 3.35,0.412 3.35,0.4 3.35,0 3.05,0 3.05,0.4 3.051,0.427 3.053,0.455 3.056,0.482 3.061,0.509 3.068,0.536 3.076,0.562 3.085,0.588 3.095,0.614 3.107,0.638 3.12,0.663 3.135,0.686 3.15,0.709 3.167,0.73 3.185,0.751 3.204,0.771 3.224,0.79 3.245,0.808 3.266,0.825 3.289,0.84 3.313,0.855 3.337,0.868 3.361,0.88 3.387,0.89 3.413,0.899 3.439,0.907 3.466,0.914 3.493,0.919 3.52,0.922 3.548,0.924 3.575,0.925
  silkscreen extent -4.78,-3 4.72,3.58, body extent -3.7,-2.78 3.7,2.78, height 2.66
Resistor [mm]
  rect 1x1.6 smd: 1(1.5,0) 2(-1.5,0)
  silkscreen extent -2.25,-1.05 2.25,1.05, body extent -1.6,-0.83 1.6,0.83, height 0.56
STM32WB55VFQFPN68 [mm]
  rect 0.97x0.22 smd: 1(-3.905,3.2) 2(-3.905,2.8) 3(-3.905,2.4) 4(-3.905,2) 5(-3.905,1.6) 6(-3.905,1.2) 7(-3.905,0.8) 8(-3.905,0.4) 9(-3.905,0) 10(-3.905,-0.4) 11(-3.905,-0.8) 12(-3.905,-1.2) 13(-3.905,-1.6) 14(-3.905,-2) 15(-3.905,-2.4) 16(-3.905,-2.8) 17(-3.905,-3.2) 35(3.905,-3.2) 36(3.905,-2.8) 37(3.905,-2.4) 38(3.905,-2) 39(3.905,-1.6) 40(3.905,-1.2) 41(3.905,-0.8) 42(3.905,-0.4) 43(3.905,0) 44(3.905,0.4) 45(3.905,0.8) 46(3.905,1.2) 47(3.905,1.6) 48(3.905,2) 49(3.905,2.4) 50(3.905,2.8) 51(3.905,3.2)
  rect 0.22x0.97 smd: 18(-3.2,-3.905) 19(-2.8,-3.905) 20(-2.4,-3.905) 21(-2,-3.905) 22(-1.6,-3.905) 23(-1.2,-3.905) 24(-0.8,-3.905) 25(-0.4,-3.905) 26(0,-3.905) 27(0.4,-3.905) 28(0.8,-3.905) 29(1.2,-3.905) 30(1.6,-3.905) 31(2,-3.905) 32(2.4,-3.905) 33(2.8,-3.905) 34(3.2,-3.905) 52(3.2,3.905) 53(2.8,3.905) 54(2.4,3.905) 55(2,3.905) 56(1.6,3.905) 57(1.2,3.905) 58(0.8,3.905) 59(0.4,3.905) 60(0,3.905) 61(-0.4,3.905) 62(-0.8,3.905) 63(-1.2,3.905) 64(-1.6,3.905) 65(-2,3.905) 66(-2.4,3.905) 67(-2.8,3.905) 68(-3.2,3.905)
  rect 6.4x6.4 smd: 69(0,0)
  silkscreen extent -4.64,-4.64 4.64,4.64, body extent -4.08,-4.05 4.02,4.05, height 1
SWD1 [mm]
  rect 1.6x1.6 hole 1.1: 1(-1.27,-1.27)
  round 1.6 hole 1.1: 2(-1.27,1.27) 3(1.27,-1.27) 4(1.27,1.27)
  silkscreen extent -2.54,-2.54 2.54,2.54, body extent -2.54,-2.54 2.54,2.54, height 8.54
THRMC1005X55N [mm]
  rect 0.8x0.6 smd: 1(-0.5,0) 2(0.5,0)
  silkscreen extent -1.15,-0.55 1.15,0.55, body extent -0.5,-0.25 0.5,0.25, height 0.55
xpt2046 [mm]
  rrect25% 1.57x0.41 smd: 1(-2.87,2.275) 2(-2.87,1.625) 3(-2.87,0.975) 4(-2.87,0.325) 5(-2.87,-0.325) 6(-2.87,-0.975) 7(-2.87,-1.625) 8(-2.87,-2.275) 9(2.87,-2.275) 10(2.87,-1.625) 11(2.87,-0.975) 12(2.87,-0.325) 13(2.87,0.325) 14(2.87,0.975) 15(2.87,1.625) 16(2.87,2.275)
  silkscreen extent -3.9,-2.75 3.91,2.75, body extent -3.2,-2.5 3.2,2.5, height 1.2

## Part data
C1 C2 C3 C4 C5 C6 C7 C8 C9 C10 C11 C12 C13 C14 C15 C16 C17 C18 C19 C20 C21 C22: "Capacitor", Manufacturer_Name=Kemet, Manufacturer_Part_Number=C0402C100C5GAC, Mouser Part Number=80-C0402C100C5GAC, Datasheet Link=https://content.kemet.com/datasheets/KEM_C1002_X7R_SMD.pdf, Height=0.55mm, Mouser Price/Stock=https://www.mouser.co.uk/ProductDetail/KEMET/C0402C100C5GAC?qs=cr8T4Ugre45eRG%2FZ0Xb5ew%3D%3D
DD1: "Integrated Circuit", Manufacturer_Name="Texas Instruments", Mouser Part Number=595-BQ24295RGER, Arrow Part Number=BQ24295RGER, Arrow Price/Stock=https://www.arrow.com/en/products/bq24295rger/texas-instruments, Datasheet Link=http://www.ti.com/lit/ds/symlink/bq24295.pdf, Height=1mm, Manufacturer_Part_Number=BQ24295RGER, Mouser Price/Stock=https://www.mouser.co.uk/ProductDetail/Texas-Instruments/BQ24295RGER?qs=igp4D3uu33JuaPeRfsSg2w%3D%3D
R1 R2 R3 R4 R5 R6 R7 R9 R10 R11 R12 R13 R14 R15 R16 R17 R18: "Resistor", Arrow Part Number=CRT0805-BY-1503EAS, Manufacturer_Name=Bourns, Mouser Part Number=652-CRT0805BY1503EAS, Arrow Price/Stock=https://www.arrow.com/en/products/crt0805-by-1503eas/bourns, Datasheet Link=http://www.bourns.com/docs/Product-Datasheets/crt-as.pdf, Height=0.65mm, Manufacturer_Part_Number=CRT0805-BY-1503EAS, Mouser Price/Stock=https://www.mouser.co.uk/ProductDetail/Bourns/CRT0805-BY-1503EAS?qs=EvbCu83THBBfYIs%252BAMVl8A%3D%3D
XPT1: library part XPT2046
XS1 XS2: "Connector", Manufacturer_Name="Wurth Elektronik", Manufacturer_Part_Number=629105136821, Mouser Part Number=710-629105136821, Datasheet Link=http://katalog.we-online.de/em/datasheet/629105136821.pdf, Mouser Price/Stock=https://www.mouser.co.uk/ProductDetail/Wurth-Elektronik/629105136821?qs=P%2FTEqz%252BQfncvaTjfhhJgDA%3D%3D

## Via types
v1: diameter 0.5, hole 0.3, Top Layer to Bottom Layer, 159 vias

## Nets (pads, with @x,y where several pads share a name; then routed paths per layer and width w, separated by ;. In a path a pad name is that pad's centre, name@x,y a point inside that pad or via, vN(x,y) a via of type N, cw(c..) or ccw(c..) an arc to the next point about the centre after c; other vN are vias at no path point)
"+3,3 В": BK1.1 C3.2 C4.2 C6.1 C7.1 C8.1 C9.1 C11.1 C13.2 C14.1 C15.1 C16.1 C22.2 DD1.15 DD1.16 DD2.13 DD2.14 DD2.33 DD2.44 DD4.10 DD4.16 DD5.10 DD5.16 DD6.10 DD6.16 HL1.33 L1.2 R2.2 R9.1 R10.1 R11.1 VD1.1 XP1.1 XPT1.1 | length 384.6
  Top Layer w0.15: HL1.33@35.2,30 35.2,27.584 v1(36.599,26.185) ; VD1.1@41.59,12.875 43.7,12.875 v1(45.198,11.377) ; v1(43.11,26.185) 46.235,26.185 49.675,29.625 ; R2.2@49.5,14.425 51.075,14.425 v1(51.575,13.925) ; C7.1@49.575,42.725 C6.1@49.575,44.975 49.575,45.975 51.9,48.3 ; C7.1@49.6,42.7 49.6,40.425 C8.1@49.625,40.4 49.65,40.375 C9.1@49.65,38.1 49.65,35.8 C13.2@49.675,35.775 49.675,29.625 ; XP1.1@52.15,26.185 52.15,27.15 49.675,29.625 ; C22.2@52.3,67.2 52.3,64.625 53,63.925 ; XPT1.1@54.535,63.925 53,63.925 ; C11.1@60.65,51.875 60.65,49.325 59.625,48.3 ; DD2.44@61.295,39.72 60.205,39.72 58.7,41.225 58.7,45.625 56.025,48.3 ; DD2.33@62.4,44.025 62.4,47.569 61.669,48.3 ; DD2.13@69.105,41.72 69.98,41.72 70.38,42.12 ; DD2.14@69.105,42.12 70.38,42.12 ; DD1.15@70.9,16.1 71.85,16.1 72.35,16.6 ; DD1.16@70.9,16.6 72.35,16.6 ; 71.524,15.922 71.524,13.751 71.45,13.677 71.45,11.425 v1(71.851,11.024) ; 73.033,45.575 70.308,48.3 61.669,48.3 ; BK1.1@73.82,74 73.82,71.62 73.033,70.833 73.033,49.625 73.05,49.608 73.05,45.575 73.05,40.247 ; L1.2@75.95,22.425 75.95,20.225 75.962,20.212 ; v1(76.3,26.525) 76.325,26.55 76.325,29.65 ; C16.1@76.395,44.15 76.395,45.336 76.42,45.361 C15.1@76.42,46.55 76.42,47.724 76.45,47.754 C14.1@76.45,48.95 ; C16.1@76.42,44.15 76.42,40.975 73.05,37.605 ; v1(77.275,16.25) 77.275,21.25 ; C3.2@79.125,23.4 79.125,22.175 78.2,21.25 ; C4.2@81.525,23.4 81.525,22.2 80.575,21.25 78.2,21.25 ; v1(99.875,36.85) 99.875,35.075 100.975,33.975 102.334,33.975 ; v1(100.556,26.515) 100.556,32.197 101.877,33.518 ; v1(101.9,37.9) 101.913,37.887 103.327,37.887 DD6.16@103.34,37.875 ; DD4.10@103.045,56.2 105.375,56.2 ; DD4.16@103.045,60.1 105.2,60.1 105.825,59.475 105.825,56.65 105.375,56.2 ; DD5.10@103.14,44.6 104.01,44.6 104.188,44.422 v1(104.188,41.349) ; DD5.16@103.14,48.5 104.675,48.5 105.832,49.656 ; DD6.10@103.34,33.975 102.334,33.975 ; 51.9,48.3 56.025,48.3 ; 51.9,48.3 49.85,48.3 49.65,48.5 49.65,62.85 50.725,63.925 53,63.925 ; 56.025,48.3 59.625,48.3 ; 59.625,48.3 61.669,48.3 ; 70.38,42.12 71.177,42.12 73.05,40.247 ; 72.35,16.6 73.05,17.3 75.962,20.212 ; 73.05,37.605 73.05,32.925 76.325,29.65 ; 73.05,37.605 73.05,40.247 ; 75.962,20.212 77,21.25 77.275,21.25 ; 76.325,29.65 76.934,29.041 77.275,28.7 77.275,21.25 ; 77.275,21.25 78.2,21.25 ; 101.877,33.518 102.334,33.975 ; 101.877,33.518 101.877,27.404 102.385,26.896 v1(104.188,26.896) 104.442,26.896 106.375,28.829 106.375,49.113 105.832,49.656 ; 105.375,56.2 105.832,55.743 105.832,49.656
  Bottom Layer w0.15: v1(36.599,26.185) v1(43.11,26.185) ; v1(45.198,11.377) 45.2,11.375 52.575,11.375 ; v1(51.575,13.925) 51.6,13.9 51.6,12.35 52.575,11.375 ; R10.1@59.875,15.675 59.875,14.424 59.85,14.399 R11.1@59.85,13.15 R9.1@59.85,10.55 59.85,9.4 60.125,9.125 ; v1(76.3,26.525) 76.305,26.52 100.551,26.52 v1(100.556,26.515) ; v1(77.275,16.25) 77.275,13.55 76.175,12.45 74.749,11.024 v1(71.851,11.024) 71.851,10.251 70.725,9.125 60.125,9.125 ; v1(99.875,36.85) 100.925,37.9 v1(101.9,37.9) ; v1(104.188,26.896) v1(104.188,41.349) ; 52.575,11.375 56.667,11.375 58.917,9.125 60.125,9.125